# Altium PCB Toygether_PCB.PcbDoc (part 1 of 2)
Units mm, origin at the board's own origin, x right, y up, seen from the top; angles counter-clockwise.
Board outline 55 x 58.13 mm, 5 copper layers (Top Layer, Signal Layer 1, Signal Layer 2, Signal Layer 3, Bottom Layer), stack 0.941 mm thick; 93 components, 74 nets, 341 pads, 162 vias.
Unrouted connection lines stored in the file: 2.
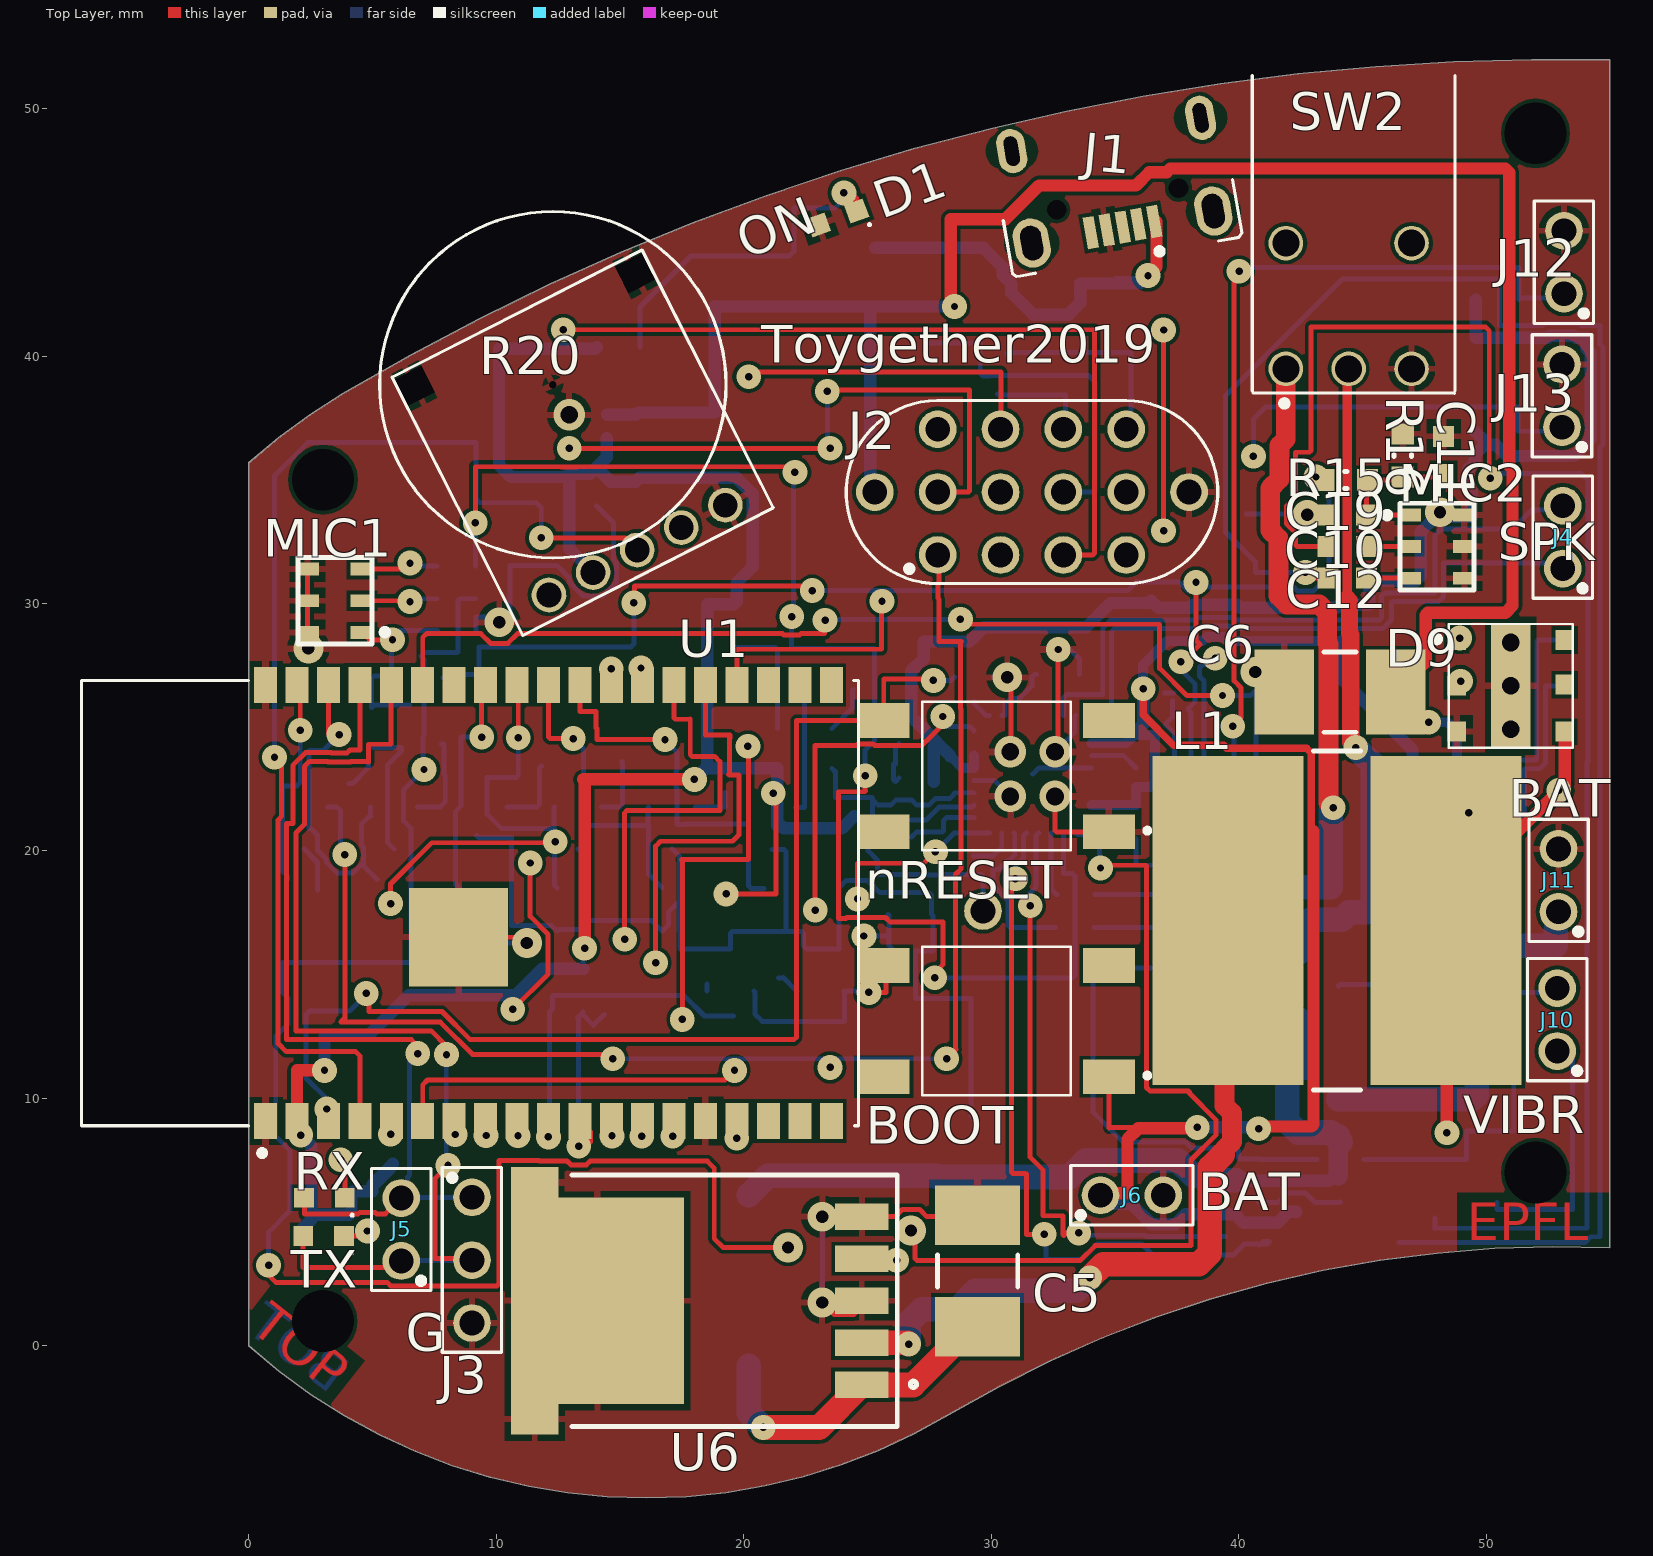
[diagram p0: Top Layer view]
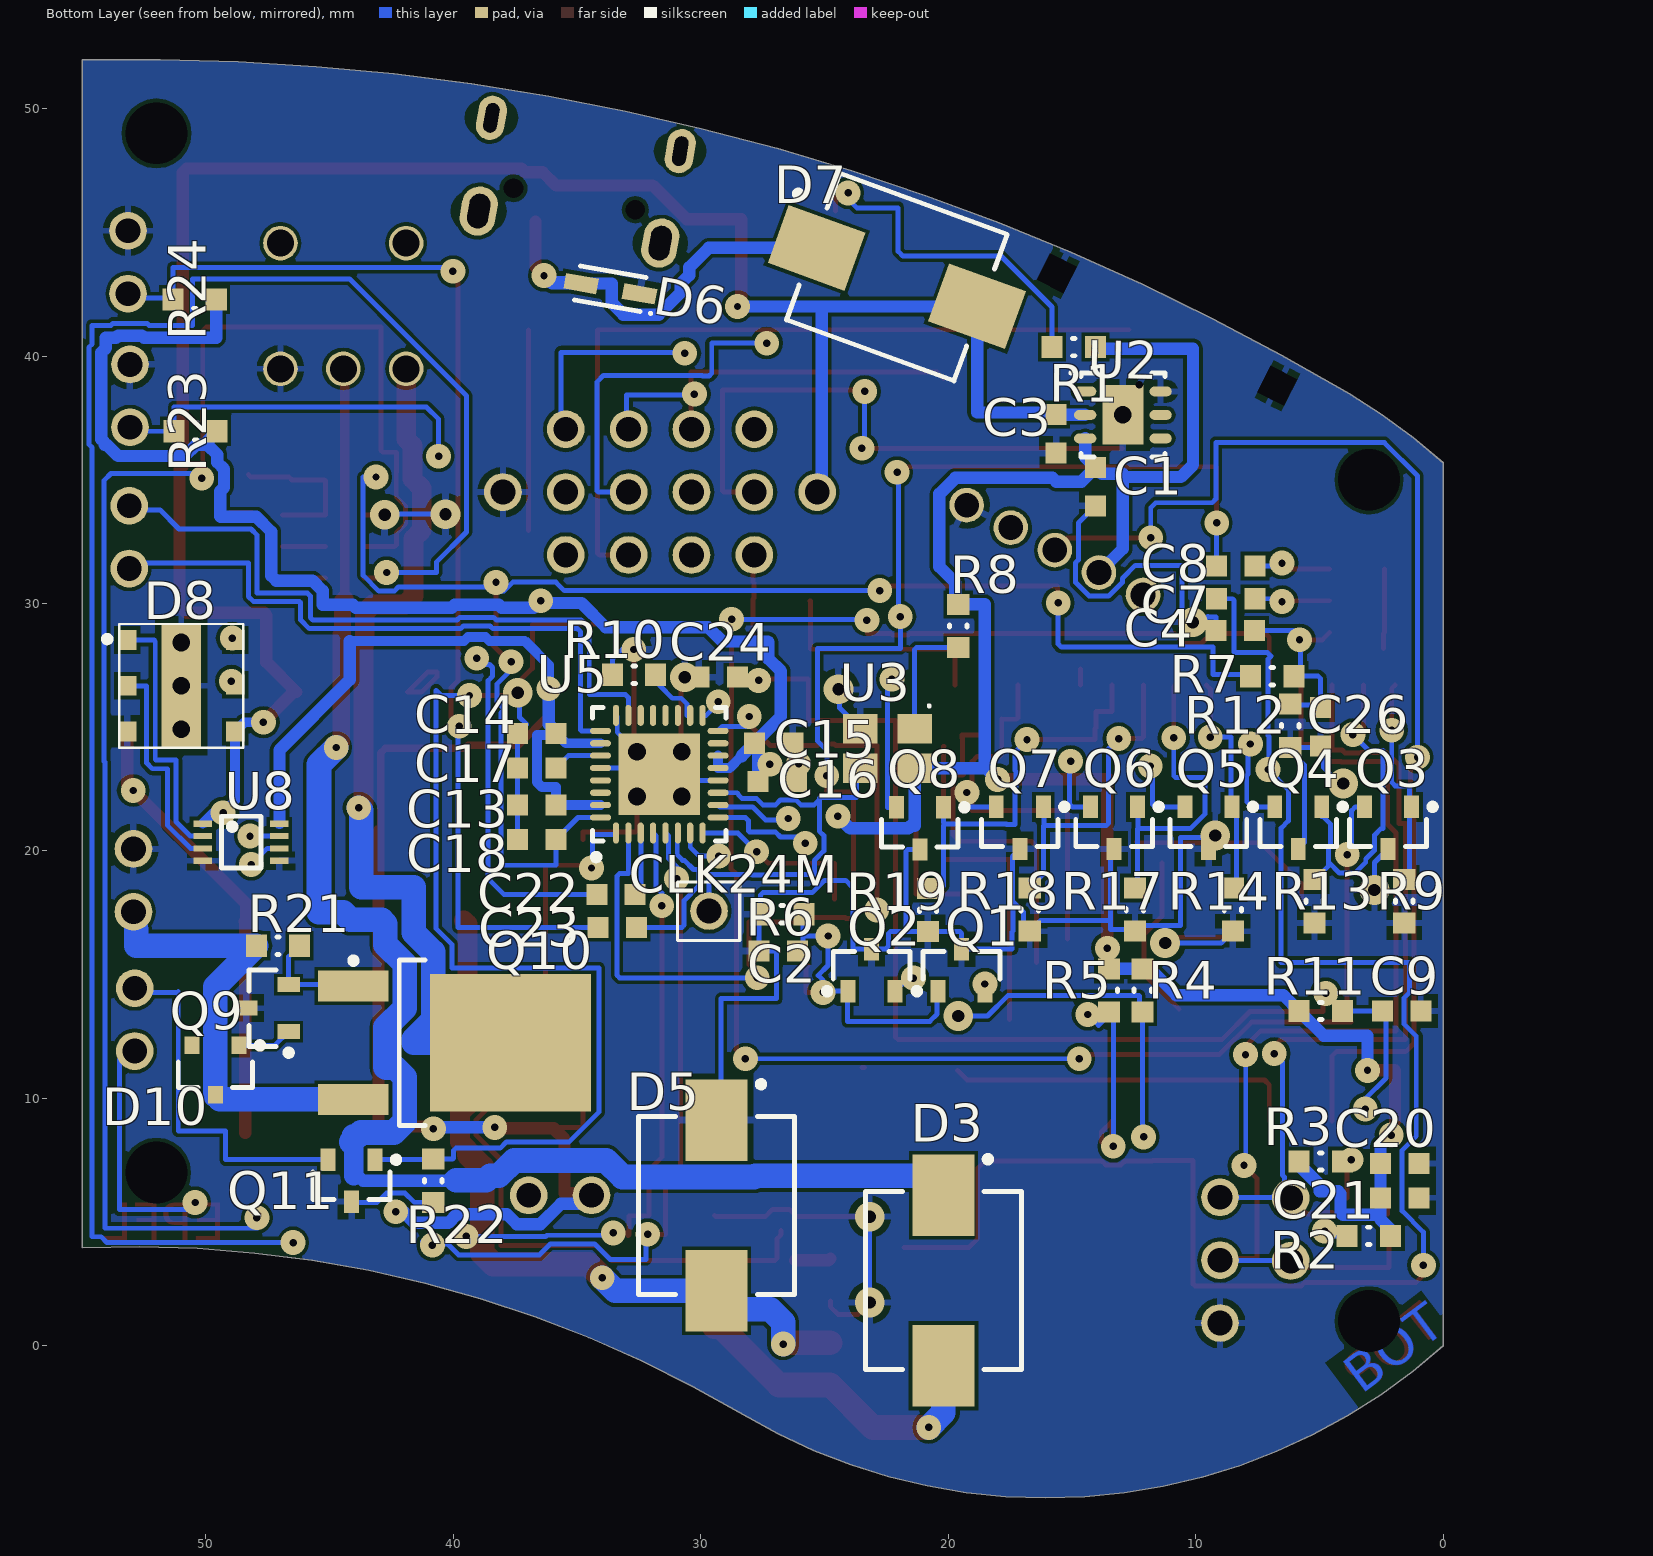
[diagram p1: Bottom Layer view, seen from below]
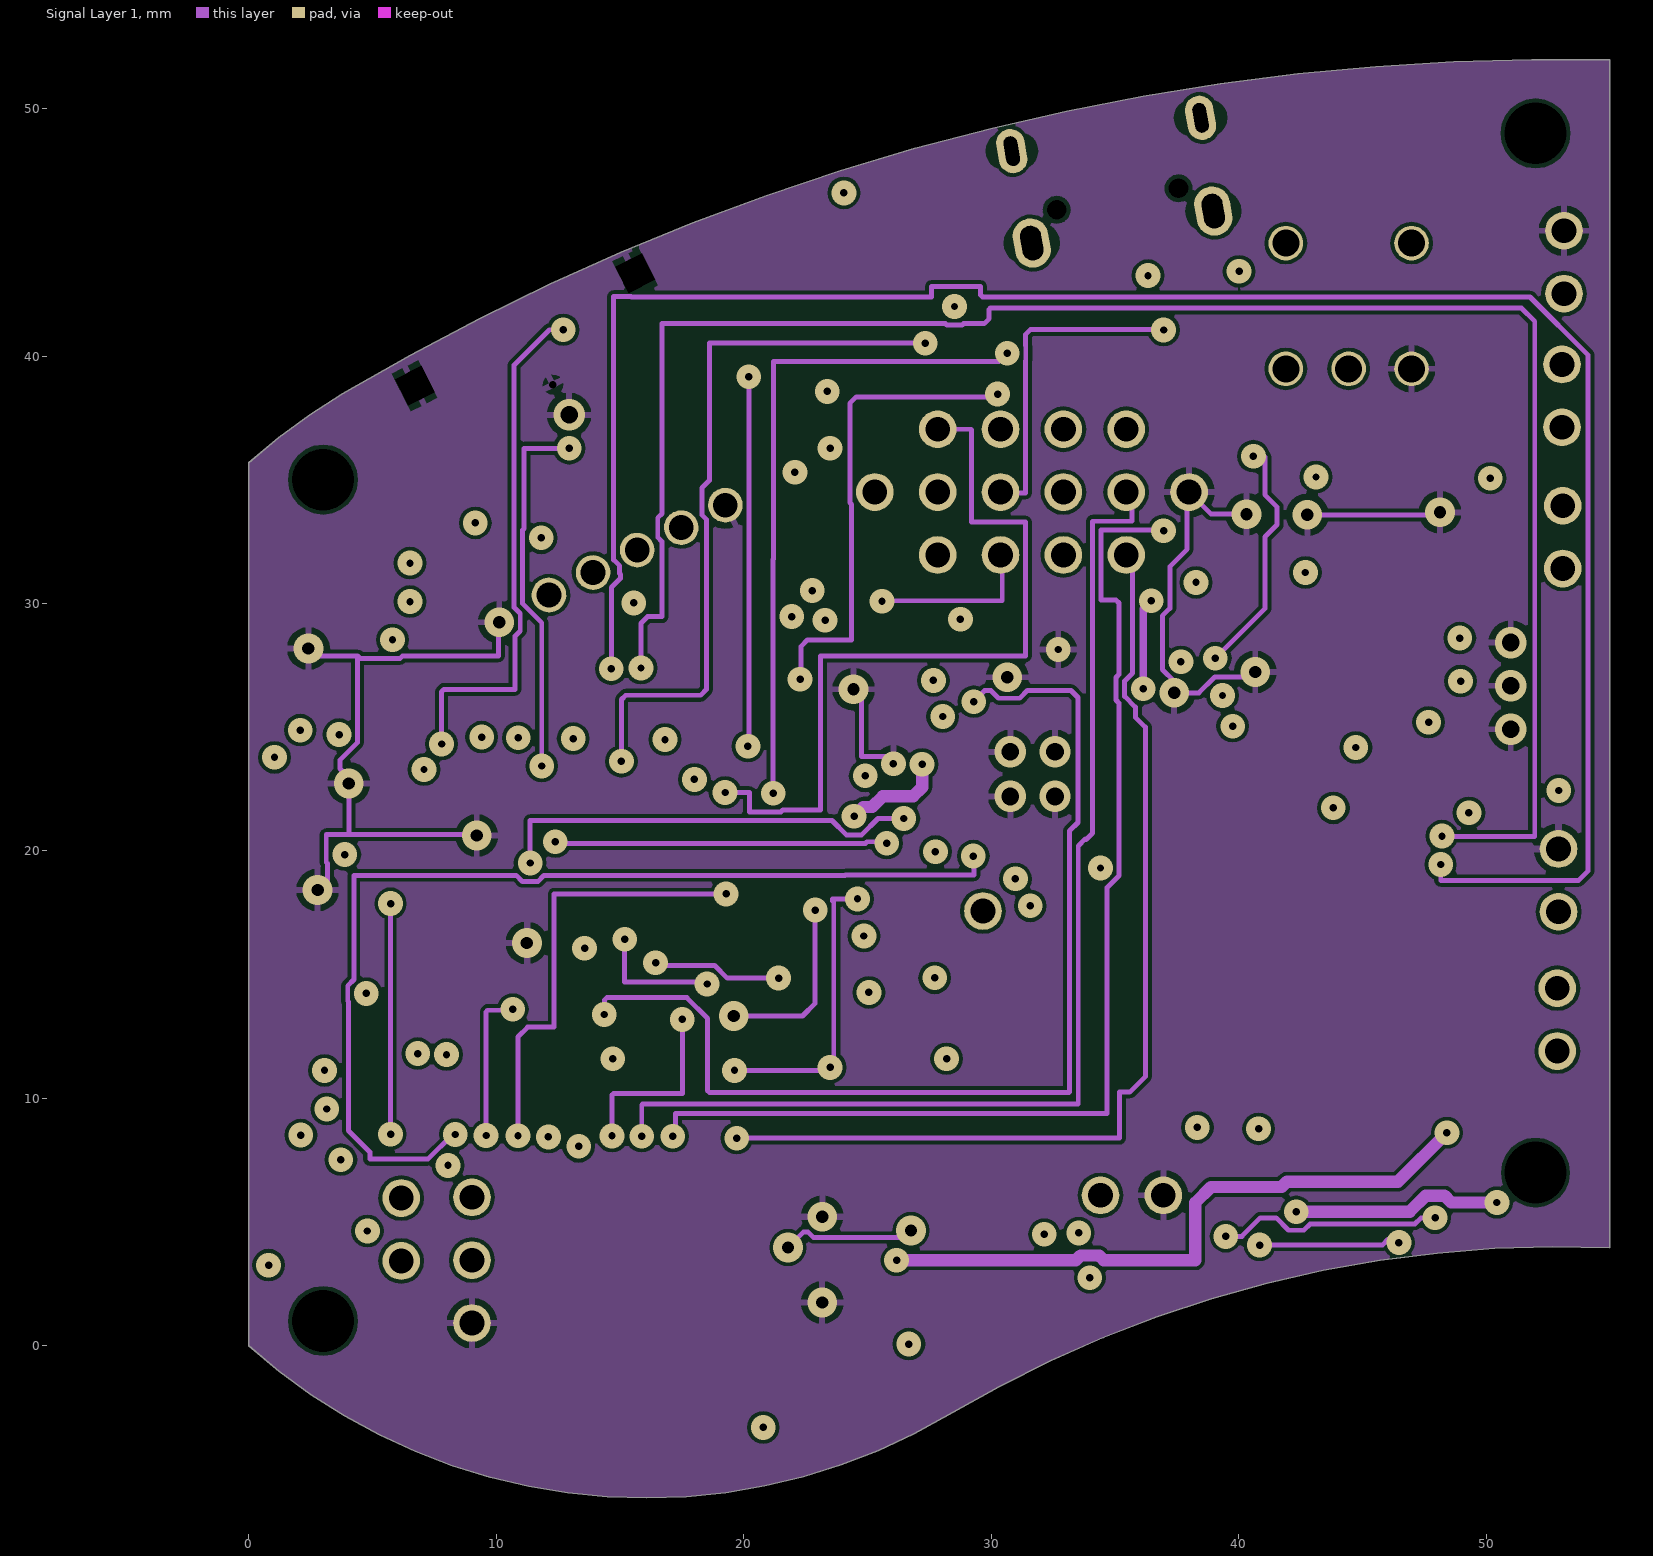
[diagram p2: Signal Layer 1]
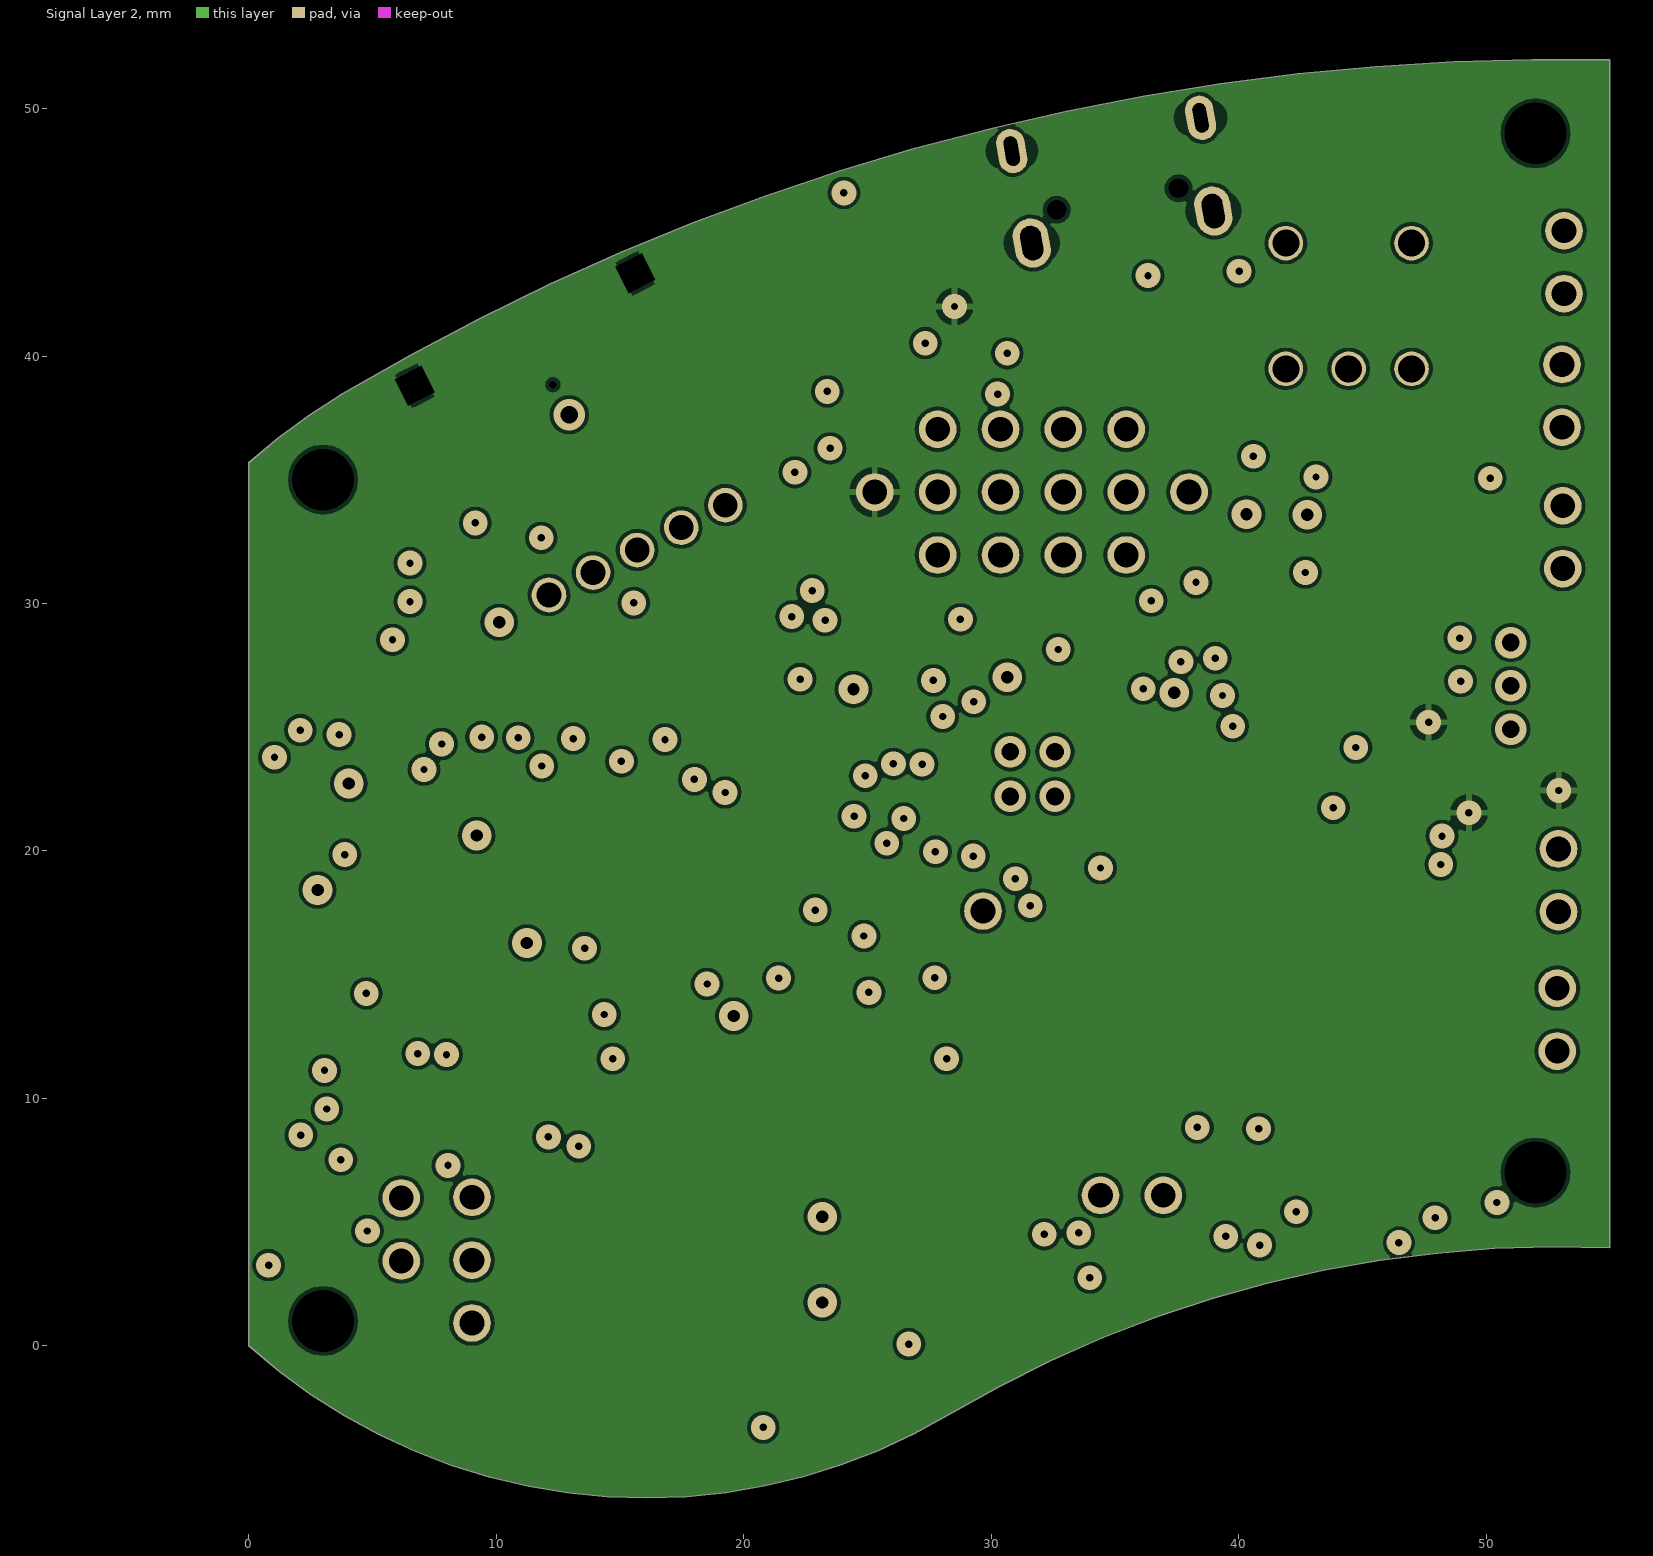
[diagram p3: Signal Layer 2]
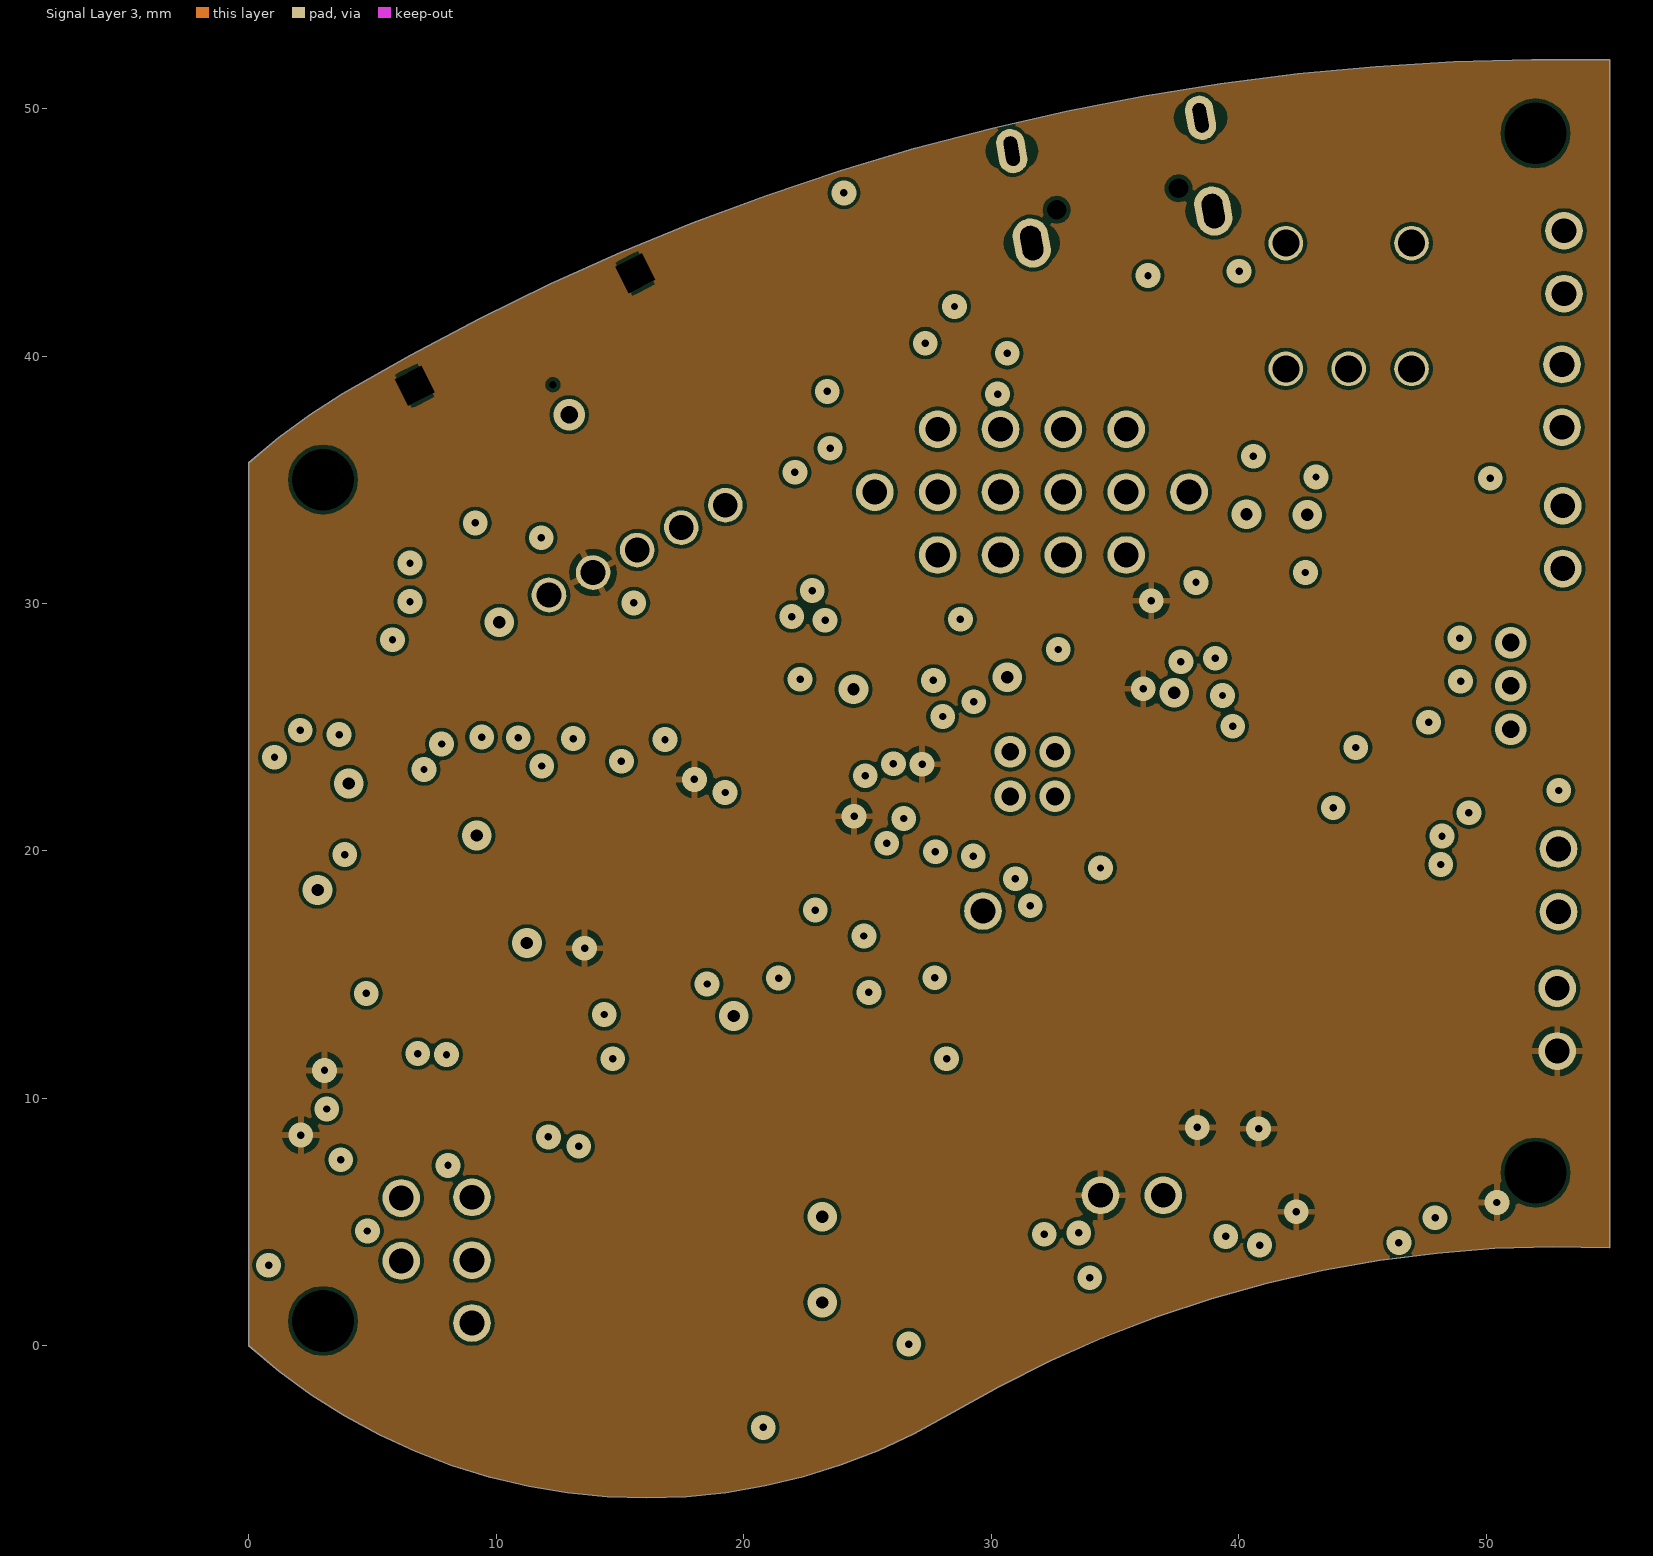
[diagram p4: Signal Layer 3]
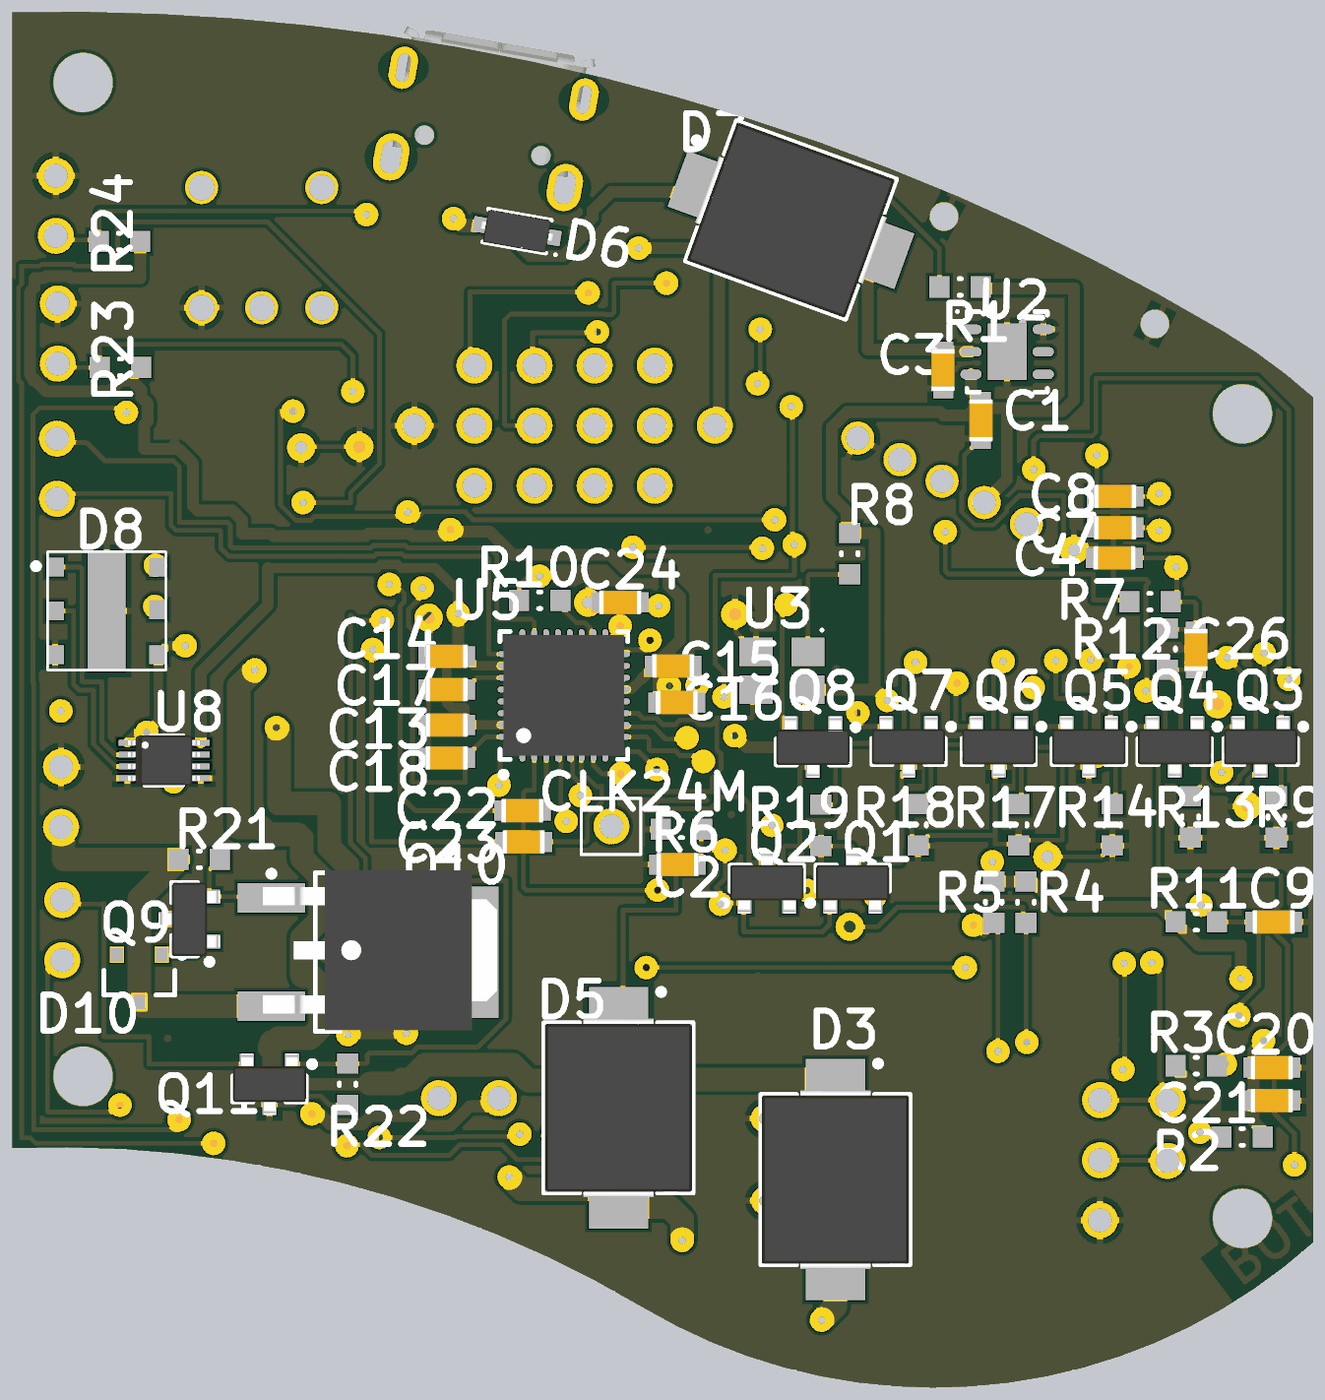
[diagram p6: 3D render of the assembled board from below, using the file's embedded part models]

## Layer stack, top to bottom
Top Solder: solder mask 0.0102, Solder Resist, Dk 3.5
Top Layer: signal copper 0.0356
Dielectric 1: core 0.254, FR-4, Dk 4.2
Signal Layer 1: signal copper 0.036
Dielectric 2: prepreg 0.127, Dk 4.2
Signal Layer 2: signal copper 0.036
Dielectric 4: core 0.254, Dk 4.2
Signal Layer 3: signal copper 0.036
Dielectric 3: prepreg 0.127, Dk 4.2
Bottom Layer: signal copper 0.0356
Bottom Solder: solder mask 0.0102, Solder Resist, Dk 3.5

## Board outline
55,51.97 51.844,51.982 48.69,51.891 45.541,51.697 42.399,51.4 39.269,51.001 36.154,50.499 33.056,49.896 29.98,49.192 26.929,48.387 23.906,47.484 20.914,46.482 17.956,45.382 15.036,44.187 12.156,42.896 9.32,41.512 6.531,40.037 3.791,38.47 2.468,37.625 1.202,36.694 0,35.683 0,0 1.225,-1.03 2.517,-1.976 3.868,-2.833 5.274,-3.599 6.728,-4.269 8.223,-4.84 9.753,-5.311 11.311,-5.679 12.89,-5.941 14.483,-6.098 16.083,-6.149 17.682,-6.092 19.275,-5.93 20.853,-5.661 22.409,-5.287 23.937,-4.811 25.43,-4.234 26.882,-3.558 28.285,-2.788 30.315,-1.647 32.397,-0.606 34.527,0.334 36.699,1.171 38.91,1.903 41.152,2.528 43.423,3.045 45.715,3.452 48.024,3.748 50.345,3.934 52.672,4.008 55,3.97

## Design rules (kind name [scope] priority, off if disabled: settings)
BoardOutlineClearance [All] p1: gap=0 ignorepadtopadclearanceinfootprint=FALSE
Clearance Clearance_1 [All] p1: gap=0.15 ignorepadtopadclearanceinfootprint=TRUE
HoleSize [All] p1: absolutevalues=TRUE maxlimit=2.54 minlimit=0.3 maxpercent=80.000 minpercent=20.000
HoleToHoleClearance [All] p1: gap=0.35 allowstackedmicrovias=TRUE
MinimumSolderMaskSliver [All] p1: minsoldermaskwidth=0.01
PlaneConnect [All] p1: planeconnectstyle=Relief reliefexpansion=0.3 reliefentries=4 reliefconductorwidth=0.2 reliefairgap=0.2
PolygonConnect [All] p1: connectstyle=Relief reliefconductorwidth=0.254 reliefentries=4 polygonreliefangle="90 Angle" airgapwidth=0.254
RoutingVias [All] p1: holewidth=0.5 width=1.2 viastyle="Through Hole" minholewidth=0.3 minwidth=1 maxholewidth=1.5 maxwidth=2.5
SilkToSilkClearance [All] p1 off: silktosilkclearance=0.15
SilkToSolderMaskClearance [IsPad] p1: minsilkscreentomaskgap=0 clearancetoexposedcopper=TRUE
SolderMaskExpansion [All] p1: expansion=0.05
UnRoutedNet [All] p1: checkbadconnections=TRUE
Width [All] p1: maxlimit=2 minlimit=0.15 preferedwidth=0.2
23 further rules are at their usual default settings.

## Components (designator, comment, footprint, x,y, rotation, side; value= is the part's Value field where it differs from the comment)
BOOT "LL3301NF065QG" PUSH_BUTTON-LL3301NF065QG 30.21,13.12 r180 top (schematic designator SW1)
C1 "4.7uF(20%)" CAPC0603 14.05,34.72 r90 bottom
C2 "0.1uF(20%)" CAPC0603 26.878,15.951 r180 bottom
C3 "4.7uF(20%)" CAPC0603 15.65,36.855 r90 bottom
C4 "0.1uF(20%)" CAPC0603 8.41,28.91 r180 bottom
C5 "100uF(20%)" CAPC2312 29.45,3.02 r270 top
C6 "100uF(20%)" CAPC2312 44.1,26.42 r0 top
C7 "4.7uF(20%)" CAPC0603 8.38,30.19 r180 bottom
C8 "4.7uF(20%)" CAPC0603 8.38,31.51 r180 bottom
C9 "0.1uF(20%)" CAPC0603 1.68,13.53 r0 bottom
C10 "4.7uF(20%)" CAPC0603 44.39,32.3 r0 top
C11 "220pF(20%)" CAPC0603 48.29,35.98 r270 top
C12 "4.7uF(20%)" CAPC0603 44.39,31.02 r0 top
C13 "4.7uF(20%)" CAPC0603 36.63,21.85 r180 bottom
C14 "4.7uF(20%)" CAPC0603 36.63,24.75 r180 bottom
C15 "4.7uF(20%)" CAPC0603 27.06,24.35 r0 bottom
C16 "4.7uF(20%)" CAPC0603 26.91,22.8 r0 bottom
C17 "4.7uF(20%)" CAPC0603 36.63,23.35 r0 bottom
C18 "4.7uF(20%)" CAPC0603 36.63,20.46 r0 bottom
C19 "0.1uF(20%)" CAPC0603 44.39,33.58 r0 top
C20 "22uF(20%)" CAPC0603 1.76,7.37 r0 bottom
C21 "0.1uF(20%)" CAPC0603 1.76,5.98 r0 bottom
C22 "4.7uF(20%)" CAPC0603 33.43,18.23 r180 bottom
C23 "4.7uF(20%)" CAPC0603 33.38,16.911 r180 bottom
C24 "0.1uF(20%)" CAPC0603 29.3,27.03 r180 bottom
C26 "220pF(20%)" CAPC0603 4.965,25.02 r90 bottom
CLK24M "PIN_TESTPOINT" PIN_TESTPOINT 29.67,17.57 r180 bottom (schematic designator J7)
D1 "SML-D12U1WT86" SML-D12U1WT86 23.79,45.58 r200 top
D3 "B340CE-13" SCH_DIODE-B3xxCE 20.2,2.64 r270 bottom
D5 "B340CE-13" SCH_DIODE-B3xxCE 29.37,5.67 r270 bottom
D6 "CDSOD323" SOD-323-SCHOTTKY_DIODE-30V/0.5A 33.66,42.72 r10 bottom
D7 "B340CE-13" SCH_DIODE-B3xxCE 22.08,43.19 r200 bottom
D8 "APA102C-5050" APA102C-5050 51,26.67 r180 bottom
D9 "APA102C-5050" APA102C-5050 51,26.67 r0 top
D10 "BZX84-A6V8,215" ZEN_DIODE-SOT23 49.62,11.14 r270 bottom
J1 "710-629105150521" USB-MICRO-TYPE-B-FEM 35.31,45.21 r190 top
J2 "EXT_CON" EXT_CON_14P 25.3,34.5 r0 top
J3 "CON_3P" CON_3P 9.02,5.99 r270 top
J4 "CON_2P" CON_2P 53.1,31.41 r90 top
J5 "CON_2P" CON_2P 6.16,3.43 r90 top
J6 "CON_2P" CON_2P 34.42,6.08 r0 top
J10 "CON_2P" CON_2P 52.88,11.91 r90 top
J11 "CON_2P" CON_2P 52.93,17.54 r90 top
J12 "CON_2P" CON_2P 53.15,42.52 r90 top
J13 "CON_2P" CON_2P 53.07,37.12 r90 top
L1 "100uH(10%)" IND1307-100uH 43.98,17.19 r0 top
MIC1 "ICS40619" MIC-ICS40619 3.48,30.11 r180 top
MIC2 "ICS40619" MIC-ICS40619 48.02,32.3 r0 top
nRESET "LL3301NF065QG" PUSH_BUTTON-LL3301NF065QG 30.21,23.02 r180 top (schematic designator SW3)
Q1 "RUC002N05HZGT116" MOS-N_RUC002N05 19.47,15.18 r90 bottom
Q2 "RUC002N05HZGT116" MOS-N_RUC002N05 23.1,15.18 r90 bottom
Q3 "RUC002N05HZGT116" MOS-N_RUC002N05 2.23,20.93 r270 bottom
Q4 "RUC002N05HZGT116" MOS-N_RUC002N05 5.86,20.93 r270 bottom
Q5 "RUC002N05HZGT116" MOS-N_RUC002N05 9.49,20.93 r270 bottom
Q6 "RUC002N05HZGT116" MOS-N_RUC002N05 13.3,20.93 r270 bottom
Q7 "RUC002N05HZGT116" MOS-N_RUC002N05 17.11,20.93 r270 bottom
Q8 "RUC002N05HZGT116" MOS-N_RUC002N05 21.15,20.91 r270 bottom
Q9 "RUC002N05HZGT116" MOS-N_RUC002N05 47.51,13.645 r0 bottom
Q10 "FDD4685-F085P" MOS-P_FDD4685 39.99,12.25 r180 bottom
Q11 "RUC002N05HZGT116" MOS-N_RUC002N05 44.12,6.67 r270 bottom
R1 "300R(5%)" RC0603 14.93,40.36 r180 bottom
R2 "300R(5%)" RC0603 3.01,4.44 r180 bottom
R3 "300R(5%)" RC0603 4.95,7.45 r0 bottom
R4 "10K(5%)" RC0603 12.15,14.36 r270 bottom
R5 "10K(5%)" RC0603 13.51,14.36 r270 bottom
R6 "10K(5%)" RC0603 26.709,17.44 r180 bottom
R7 "680R(5%)" RC0603 6.91,27.06 r0 bottom
R8 "10K(5%)" RC0603 19.6,29.09 r270 bottom
R9 "10K(5%)" RC0603 1.57,17.96 r90 bottom
R10 "10K(5%)" RC0603 32.7,27.12 r180 bottom
R11 "10K(5%)" RC0603 4.95,13.53 r0 bottom
R12 "47K(5%)" RC0603 6.18,25.06 r90 bottom
R13 "10K(5%)" RC0603 5.2,17.96 r90 bottom
R14 "10K(5%)" RC0603 8.5,17.63 r90 bottom
R15 "680R(5%)" RC0603 44.33,34.99 r180 top
R16 "47K(5%)" RC0603 46.64,35.98 r270 top
R17 "10K(5%)" RC0603 12.46,17.63 r90 bottom
R18 "10K(5%)" RC0603 16.71,17.63 r90 bottom
R19 "10K(5%)" RC0603 20.82,17.61 r90 bottom
R20 "10K" POT-RK10J12E0A0A 15.695,32.157 r27 top
R21 "10M(5%)" RC0603 47.09,16.17 r0 bottom
R22 "10K(5%)" RC0603 40.82,6.67 r90 bottom
R23 "10K(5%)" RC0603 50.42,36.96 r180 bottom
R24 "10K(5%)" RC0603 50.46,42.28 r180 bottom
RX "SML-D12Y1WT86" SML-D12U1WT86 3.055,5.98 r180 top (schematic designator D2)
SW2 "200MSP1T1B2M6QE" "SPDT- 200MSP1T1B2M6QE" 44.45,39.483 r0 top
TX "SML-D12D1W" SML-D12U1WT86 3.025,4.44 r180 top (schematic designator D4)
U1 "ESP-WROVER-IB" ESP32-WROVER-I 8.94,17.89 r90 top locked
U2 "ST1L05APU33R" LDO-ST1L05 12.945,37.62 r180 bottom
U3 "OSC_24MHz" OSC_24MHz 22.46,24.14 r0 bottom
U5 "WM8978_CODEC" WM8978_CODEC 31.68,23.1 r90 bottom
U6 "LM2576SX-5.0" LM2576SX-STEP_DOWN-5.0 12.307,1.82 r0 top
U8 "SN74LVC2T45DCTRE4" VOLTAGE_TRANSLATOR_3.3-5V 48.58,20.35 r180 bottom

## Footprints (in the part's own frame and the unit in brackets; to place one, negate y for a bottom-side part, rotate by r counter-clockwise, add the part's x,y. Pads: shape width x height; smd on the part's side, far side on the other; paste and mask are expansions set on the pad)
APA102C-5050 [mm]
  rect 0.75x0.8 smd: 1(-2.175,1.85) 2(-2.175,0) 3(-2.175,-1.85) 4(2.175,-1.85) 5(2.175,0.05) 6(2.175,1.85)
  rect 1.6x5.1 smd: 3(0,0)
  silkscreen extent -3.12,-2.5 2.5,2.5
CAPC0603 [mm] "Chip Capacitor, 2-Leads, Body 1,60x0,80mm, IPC Medium Density"
  rect 0.85x0.85 smd: 1(-0.775,0) 2(0.775,0)
  body extent -0.9,-0.5 0.9,0.5, height 1
CAPC2312 [mm] "Chip Capacitor, 2-Leads, Body 6.00x3.25mm, IPC Medium Density"
  rect 2.4x3.45 smd: 1(-2.25,0) 2(2.25,0)
  silkscreen extent -0.65,-1.63 0.65,1.63, body extent -3.1,-1.7 3.1,1.7, height 2
CON_2P [mil]
  round 60 hole 39.37: 1(0,0) 2(100,0)
  silkscreen extent -47,-47 147,47
CON_3P [mm]
  round 1.524 hole 1: 1(-0.01,0) 2(2.53,0) 3(5.07,0)
  silkscreen extent -1.21,-1.2 6.25,1.2
ESP32-WROVER-I [mm] "SMD, 38-Leads, Body 18x25.5mm, Pitch 1.27mm"
  rect 1.45x0.93 smd: 1(-8.81,8.26) 2(-8.81,6.99) 3(-8.81,5.72) 4(-8.81,4.45) 5(-8.81,3.18) 6(-8.81,1.91) 7(-8.81,0.64) 8(-8.81,-0.63) 9(-8.81,-1.9) 10(-8.81,-3.17) 11(-8.81,-4.44) 12(-8.81,-5.71) 13(-8.81,-6.98) 14(-8.81,-8.25) 15(-8.81,-9.52) 16(-8.81,-10.79) 17(-8.81,-12.06) 18(-8.81,-13.33) 19(-8.81,-14.6) 20(8.81,-14.6) 21(8.81,-13.33) 22(8.81,-12.06) 23(8.81,-10.79) 24(8.81,-9.52) 25(8.81,-8.25) 26(8.81,-6.98) 27(8.81,-5.71) 28(8.81,-4.44) 29(8.81,-3.17) 30(8.81,-1.9) 31(8.81,-0.63) 32(8.81,0.64) 33(8.81,1.91) 34(8.81,3.18) 35(8.81,4.45) 36(8.81,5.72) 37(8.81,6.99) 38(8.81,8.26)
  rect 4x4 smd: 39(-1.38,0.47)
  silkscreen extent -10.22,-15.7 9,15.7
EXT_CON_14P [mil]
  round 60 hole 39.37: 1(100,-100) 2(200,-100) 3(300,-100) 4(400,-100) 5(100,0) 6(200,0) 7(300,0) 8(400,0) 9(100,100) 10(200,100) 11(300,100) 12(400,100) 13(0,0) 14(500,0)
  silkscreen extent -46,-146 546,146
IND1307-100uH [mm] "Precision Wire Wound Inductor, 2-Leads, Body 13.00x13.00mm, IPC Medium Density"
  rect 6.1x13.3 smd: 1(-4.4,0) 2(4.4,0)
  silkscreen extent -0.95,-6.85 0.95,6.85, body extent -6.6,-6.5 6.6,6.5, height 7.4
LDO-ST1L05 [mm] "SON, 6-Leads, Body 3x3mm, Pitch 0.95mm, Thermal Pad 2.4x1.65mm, IPC Low Density"
  oval 0.9x0.4 smd: 1(-1.525,0.95) 2(-1.525,0) 3(-1.525,-0.95) 4(1.525,-0.95) 5(1.525,0) 6(1.525,0.95)
  rect 1.65x2.4 smd: 7(0,0)
  silkscreen extent -2.15,-1.7 1.7,1.75, body extent -1.55,-1.55 1.55,1.55, height 0.95
LM2576SX-STEP_DOWN-5.0 [mm]
  rect 2.16x1.07 smd: 1(12.461,-3.4) 2(12.461,-1.7) 3(12.461,0) 4(12.461,1.7) 5(12.461,3.4)
  rect 1.91x1.235 smd: 6(-0.754,-4.782) 6(-0.754,4.782)
  rect 6.99x8.33 smd: 6(1.786,0)
  silkscreen extent 0.76,-5.08 14.68,5.08
MIC-ICS40619 [mm] "SOTFL, 6-Leads, Body 3.50x3.14mm, Pitch 1.28mm, IPC Medium Density"
  rect 0.932x0.522 smd: 1(-1.105,1.28) 2(-1.105,0) 3(-1.105,-1.28) 4(1.105,-1.28) 5(1.105,0) 6(1.105,1.28)
  silkscreen extent -2.15,-1.75 1.5,1.75, body extent -1.32,-1.75 1.33,1.75, height 0.99
MOS-N_RUC002N05 [mm] "SOT23, 3-Leads, Body 2.90x2.40mm, Pitch 0.95mm, IPC Medium Density"
  rect 0.9x0.6 smd: 1(-0.85,0.95) 2(-0.85,-0.95) 3(0.85,0)
  silkscreen extent -0.97,-1.55 0.75,1.93, body extent -1.3,-1.55 1.3,1.55, height 1.2
MOS-P_FDD4685 [mm] "DPAK, 3-Leads, Body 6.75x6.22mm, Pitch 2.29mm, IPC High Density"
  rect 2.85x1.25 smd: 1(-4.05,2.29) 2(-4.05,-2.29)
  rect 6.5x5.55 smd: 3(2.3,0)
  silkscreen extent -4.18,-3.35 -1.15,3.44, body extent -4.41,-3.3 5.5,3.45, height 2.39
OSC_24MHz [mm] "ECS-3225MV SMD Multi Volt Crystal Oscillator"
  rect 1.4x1.2 smd: 1(-1.1,-0.8) 2(1.1,-0.8) 3(1.1,0.8) 4(-1.1,0.8)
  silkscreen extent -1.74,-1.77 -1.64,-1.67, body extent -1.65,-1.3 1.65,1.3, height 1.2
PIN_TESTPOINT [mil]
  round 60 hole 39.37: 1(0,0)
  silkscreen extent -50,-47 49,46
POT-RK10J12E0A0A [mm]
  rect 0x0 hole 1.2 square: 1(-5,10) 1(5,10)
  round 0 hole 0.3: 1(0,7.5)
  round 1.4 hole 1: 1(4,0) 2(0,0) 3(-2,0) 4(2,0) 5(-4,0)
  silkscreen extent -7,-0.97 7,14.5
PUSH_BUTTON-LL3301NF065QG [mm]
  rect 2.1x1.4 smd: 1(-4.55,2.25) 2(4.55,2.25) 3(-4.55,-2.25) 4(4.55,-2.25)
  silkscreen extent -6.2,-3 3,3, body extent -4.5,-3 4.5,3, height 4.3
RC0603 [mm] "Chip Resistor, 2-Leads, Body 1.60x0.80mm, IPC Medium Density"
  rect 0.85x0.9 smd: 1(-0.875,0) 2(0.875,0)
  silkscreen extent -0.05,-0.35 0.05,0.35, body extent -0.75,-0.45 0.75,0.45, height 0.55
SCH_DIODE-B3xxCE [mm] "Molded Diode, 2-Leads, Body 6.86x5.91mm, IPC Medium Density"
  rect 3.3x2.5 smd: 1(-3.45,0) 2(3.45,0)
  silkscreen extent -5.02,-3.15 3.6,3.15, body extent -3.77,-3.11 3.77,3.11, height 2.5
SML-D12U1WT86 [mm] "Molded Diode, 2-Leads, Body 1,60x0,80mm, IPC Medium Density"
  rect 0.8x0.8 smd: 1(-0.825,0) 2(0.825,0)
  silkscreen extent -1.17,0.65 -1.08,0.75, body extent -1.07,-0.45 1.07,0.45, height 0.65
SOD-323-SCHOTTKY_DIODE-30V/0.5A [mm] "Molded Diode, 2-Leads, Body 2,50x1,30mm, IPC Medium Density"
  rect 1.35x0.65 smd: 1(-1.2,0) 2(1.2,0)
  silkscreen extent -1.82,-0.7 1.35,0.75, body extent -1.57,-0.7 1.57,0.7, height 1.1
"SPDT- 200MSP1T1B2M6QE" [mm]
  round 1.4 hole 1.09: 1(-2.54,0) 2(0,0) 3(2.54,0) 4(-2.54,5.08) 5(2.54,5.08)
  silkscreen extent -3.9,-1.52 4.3,11.85
USB-MICRO-TYPE-B-FEM [mm]
  rect 0.45x1.3 smd: 1(-1.3,0) 2(-0.65,0) 3(0,0) 4(0.65,0) 5(1.3,0)
  oval 1.15x1.8 hole 1.2 slot 0.55 at 0 deg: ""(-3.875,-3.8) ""(3.875,-3.8)
  oval 1.45x2 hole 1.4 slot 0.85 at 0 deg: ""(-3.725,0) ""(3.725,0)
  round 0 hole 0.8: ""(-2.5,-1.15) ""(2.5,-1.15)
  silkscreen extent -4.71,-1.13 4.7,1.35, body extent -4.1,-5.55 4.1,-0.15, height 2.67
VOLTAGE_TRANSLATOR_3.3-5V [mm] "TSSOP, 8-Leads, Body 2,00x2,30mm, Pitch 0,50mm, IPC Medium Density"
  rect 0.75x0.25 smd mask+0.102: 1(-1.55,0.75) 2(-1.55,0.25) 3(-1.55,-0.25) 4(-1.55,-0.75) 5(1.55,-0.75) 6(1.55,-0.25) 7(1.55,0.25) 8(1.55,0.75)
  silkscreen extent -0.8,-1.05 0.8,1.05, body extent -1.55,-1.05 1.55,1.05, height 0.9
WM8978_CODEC [mm] "QFN, 32-Leads, Body 5.00x5.00mm, Pitch 0.50mm, Thermal Pad 3.30x3.30mm, IPC Medium Density"
  oval 0.85x0.25 smd: 1(-2.375,1.75) 2(-2.375,1.25) 3(-2.375,0.75) 4(-2.375,0.25) 5(-2.375,-0.25) 6(-2.375,-0.75) 7(-2.375,-1.25) 8(-2.375,-1.75) 17(2.375,-1.75) 18(2.375,-1.25) 19(2.375,-0.75) 20(2.375,-0.25) 21(2.375,0.25) 22(2.375,0.75) 23(2.375,1.25) 24(2.375,1.75)
  oval 0.25x0.85 smd: 9(-1.75,-2.375) 10(-1.25,-2.375) 11(-0.75,-2.375) 12(-0.25,-2.375) 13(0.25,-2.375) 14(0.75,-2.375) 15(1.25,-2.375) 16(1.75,-2.375) 25(1.75,2.375) 26(1.25,2.375) 27(0.75,2.375) 28(0.25,2.375) 29(-0.25,2.375) 30(-0.75,2.375) 31(-1.25,2.375) 32(-1.75,2.375)
  rect 3.3x3.3 smd: 33(0,0)
  silkscreen extent -3.47,-2.7 2.7,2.7, body extent -2.55,-2.55 2.55,2.55, height 1
ZEN_DIODE-SOT23 [mm] "SOT23, 3-Leads, Body 3x1.4mm, Pitch 0.95mm"
  rect 0.7x0.6 smd paste-0.05: 1(-1,0.95) 2(-1,-0.95) 3(1,0)
  silkscreen extent -1.12,-1.5 0.7,1.92, body extent -0.7,-1.5 0.7,1.5, height 1.1

## Part data
BOOT nRESET: library part SPST_SW, Supplier Part Number 1=612-LL3301NF065QG, Supplier 1=Mouser
C1 C3 C7 C8 C10 C12 C13 C14 C15 C16 C17 C18 C22 C23: library part CAP-4.7uF(20%), "C1608JB1V475M080AC", Supplier Part Number 1=810-C1608JB1V475M08C, Supplier 1=Mouser
C2 C4 C9 C19 C21 C24: library part CAP-0.1uF(20%), "C1608X8R1E104M080AA", Supplier Part Number 1=810-C1608X8R1E104M0A, Supplier 1=Mouser
C5 C6: library part CAP-100uF(20%), "GRM31CR61A107ME05L", Supplier Part Number 1=581-TPSF107M016R0200, Supplier 1=Mouser
C11 C26: library part CAP-220pF(20%), "C1608CH2A221J080AA", Supplier Part Number 1=810-C1608CH2A221J08A, Supplier 1=Mouser
C20: library part CAP-22uF(20%), "F380J226MMAAH1", Supplier Part Number 1=581-F380J226MMAAH1, Supplier 1=Mouser
CLK24M: "1 Position Header, Breakaway Connector 0.100\" (2.54mm) Through Hole Tin"
D1: library part RED_LED, "SML-D12U1WT86-2.2V-20mA", Supplier Part Number 1=755-SML-D12U1WT86, Supplier 1=Mouser
D3 D5 D7: library part SCH_DIODE, Supplier Part Number 1=621-B340CE-13, Supplier 1=Mouser
D6: library part BIDIRECTIONAL_DIODE, "CDSOD323-T05LC - ESD Suppressors / TVS Diodes Bidirectional Ultra Low Cap", Supplier Part Number 1=652-CDSOD323-T05LC, Supplier 1=Mouser
D8 D9: library part APA102C, Supplier Part Number 1=474-COM-14863, Supplier 1=Mouser
D10: library part ZEN_DIODE-6.15V, Supplier Part Number 1=771-BZX84-A6V8,215, Supplier 1=Mouser
J1: library part USB-MICRO-TYPE-B_CON_6P, "USB Micro SMT Type B Horizontal", Supplier 1=Mouser, Supplier Part Number 1=710-629105150521
J2: "External connector to the LEDs and capacitive touch sensors (on the plush toy)"
J3: "3 Positions Header, Breakaway Connector 0.100\" (2.54mm) Through Hole Tin"
J4 J5 J6 J10 J11 J12 J13: "2 Positions Header, Breakaway Connector 0.100\" (2.54mm) Through Hole Tin"
L1: library part IND-100uH(10%), "SDR1307A-101K", Supplier Part Number 1=652-SDR1307A-101K, Supplier 1=Mouser
MIC1 MIC2: library part MIC-ICS40619, "Differential analog top-port microphone", Supplier Part Number 1=410-ICS-40619, Supplier 1=Mouser
Q1 Q2 Q3 Q4 Q5 Q6 Q7 Q8 Q9 Q11: library part MOSFET_N-CH_RUC002N05HZGT116, "RUC002N05HZGT116 (N-CH/50V/2.2R/200mA)", Supplier Part Number 1=755-RUC002N05HZGT116, Supplier 1=Mouser
Q10: library part MOSFET_P-CH_FDD4685-F085P, "FDD4685-F085P(P-CH/40V/35mR/32A)", Supplier Part Number 1=512-FDD4685_F085P, Supplier 1=Mouser
R1 R2 R3: library part RES-300R(5%), "RC0603JR-07300RL", Supplier Part Number 1=603-RC0603JR-07300RL, Supplier 1=Mouser
R4 R5 R6 R8 R9 R10 R11 R13 R14 R17 R18 R19 R22 R23 R24: library part RES-10K(5%), "RC0603JR-0710KL", Supplier Part Number 1=603-RC0603JR-0710KL, Supplier 1=Mouser
R7 R15: library part RES-680R(5%), "RC0603JR-07680RL", Supplier Part Number 1=603-RC0603JR-07680RL, Supplier 1=Mouser
R12 R16: library part RES-47K(5%), "RC0603JR-0747KL", Supplier Part Number 1=603-RC0603JR-0747KL, Supplier 1=Mouser
R20: library part POT-10K, "RK10J12E0A0A", Supplier Part Number 1=688-RK10J12E0A0A, Supplier 1=Mouser
R21: library part RES-10M(5%), "CRCW060310M0DHEAP", Supplier Part Number 1=71-CRCW060310M0DHEAP, Supplier 1=Mouser
RX: library part YELLOW_LED, "SML-D12Y1WT86_YELLOW-LED", Supplier Part Number 1=755-SML-D12Y1WT86, Supplier 1=Mouser
SW2: library part SPDT_SW, Supplier Part Number 1=612-200MSP1T1B2M6QE, Supplier 1=Mouser
TX: library part ORANGE_LED, "SML-D12D1WT86_ORANGE-LED", Supplier Part Number 1=755-SML-D12D1WT86, Supplier 1=Mouser
U1: Supplier Part Number 1=356-ESP32WROIB(16MB), Supplier 1=Mouser
U2: library part LDO-3.3, "Low drop linear voltage regulator", Supplier Part Number 1=511-ST1L05APU33R, Supplier 1=Mouser
U3: "Crystal Oscillator for CODEC", Supplier Part Number 1=520-3225MV-240-BNT, Supplier 1=Mouser
U5: "Stereo CODEC WM8978 with Speaker Driver", Supplier Part Number 1=238-WM8978CGEFL/V, Supplier 1=Mouser
U6: library part STEP_DOWN_LM2576SX-5.0, "LM2576SX-5.0/NOPB step down voltage regulator", Supplier Part Number 1=926-LM2576SX-5.0NOPB, Supplier 1=Mouser
U8: library part VOLTAGE_TRANSLATOR_3.3-5V, "Translation - Voltage Levels DUAL-BIT DUAL SUPPLY TRANSCEIVER", Supplier Part Number 1=595-SN74LVC2T45DCTR, Supplier 1=Mouser

## Free pads (board coordinates)
  round 1.524 hole 2.5: ""(3,1) ""(3,35) ""(52,7) ""(52,49)

## Via types
v1: diameter 1, hole 0.3, Top Layer to Bottom Layer, 78 vias
v2: diameter 1, hole 0.3, Top Layer to Signal Layer 1, 31 vias
v3: diameter 1, hole 0.3, Signal Layer 1 to Bottom Layer, 27 vias
v4: diameter 1.27, hole 0.711, Top Layer to Bottom Layer, 8 vias
v5: diameter 1.2, hole 0.5, Signal Layer 1 to Bottom Layer, 7 vias
v6: diameter 1.2, hole 0.5, Top Layer to Bottom Layer, 6 vias
v7: diameter 1.2, hole 0.5, Top Layer to Signal Layer 1, 5 vias

## Nets (pads, with @x,y where several pads share a name; then routed paths per layer and width w, separated by ;. In a path a pad name is that pad's centre, name@x,y a point inside that pad or via, vN(x,y) a via of type N, cw(c..) or ccw(c..) an arc to the next point about the centre after c; other vN are vias at no path point)
3V3: BOOT.1 C1.2 C13.2 C14.2 C15.2 C16.2 C20.2 C21.2 J6.1 J10.1 R1.2 R2.2 R3.2 R4.1 R5.1 R8.1 R11.2 R20.3 R23.2 R24.2 U1.2 U2.3 U3.4 U5.13 U5.14 U5.26 U5.31 U8.8 | length 247
  Top Layer w0.2: BOOT.1@34.76,10.87 34.76,8.82 34.77,8.81 34.785,8.825 35.985,8.825 35.948,8.788
  Top Layer w0.3: v1(36.145,26.554) 36.145,25.495 37.37,24.27 39.399,24.27 39.529,24.14 42.754,24.14 42.93,23.964 42.93,20.89 43.03,20.79
  Top Layer w0.5: U1.2@1.95,9.08 1.95,11.13 v1(3.06,11.13) ; v1(13.57,16.07) 13.57,22.83 13.51,22.89 v1(18.01,22.89) ; J6.1@34.42,6.08 34.51,6.17 35.51,6.17 35.51,8.35 35.948,8.788 38.296,8.788 v1(38.333,8.825) ; v1(40.81,8.77) 40.9,8.86 42.94,8.86 43.03,8.95 43.03,20.79
  Signal Layer 1 w0.2: v3(24.46,21.4) 24.835,21.775
  Signal Layer 1 w0.3: v1(36.145,26.554) 36.145,29.785 v3(36.47,30.11)
  Signal Layer 1 w0.5: 24.835,21.775 25.189,21.775 25.624,22.21 26.85,22.21 27.21,22.57 v3(27.21,23.5) ; v3(42.33,5.42) 46.919,5.42 47.569,6.07 48.314,6.07 48.594,5.79 v3(50.44,5.79)
  Bottom Layer w0.2: C20.2@2.535,7.37 C20.2@2.535,7.605 ; 4.998,6.239 5.825,7.066 R3.2@5.825,7.354 ; 12.95,35.11 12.95,35.234 ; R5.1@13.51,15.235 13.51,16.01 v1(13.57,16.07) ; 18.535,29.01 18.59,28.955 18.59,23.34 ; U5.13@29.305,23.35 U5.14@29.305,23.85 ; C14.2@35.855,24.75 C14.2@35.855,24.825 ; U8.8@47.03,21.1 U8.8@47.03,21.125 ; v3(50.44,5.79) 50.44,5.53 50.47,5.5 53.5,5.5 53.5,11.56 J10.1@53.32,11.74
  Bottom Layer w0.4: 28.352,23.832 28.835,23.35 U5.13@29.305,23.35 U5.14@29.305,23.85 ; U5.31@34.055,21.85 C13.2@35.855,21.85 35.855,22.575 36.425,22.575 36.63,22.78 36.63,24.685 35.855,24.685 C14.2@35.855,24.75 35.455,24.35 U5.26@34.055,24.35 ; v1(36.145,26.554) 36.145,27.515 37.12,28.49 38.022,28.49 38.032,28.48 38.548,28.48 38.708,28.64 39.412,28.64 39.572,28.48 44.19,28.48
  Bottom Layer w0.5: v1(2.105,8.514) 2.535,8.084 C20.2@2.535,7.605 ; R2.2@2.135,4.44 2.135,4.7 2.535,5.1 2.535,5.29 ; C20.2@2.535,7.37 C21.2@2.535,5.98 2.535,5.29 ; v1(3.06,11.13) 3.06,12.53 4.825,12.53 R11.2@5.825,13.53 6.465,14.17 10.79,14.17 11.855,15.235 R4.1@12.15,15.235 R5.1@13.51,15.235 ; R3.2@5.825,7.354 4.998,6.527 4.998,6.239 4.247,6.239 4.149,6.141 4.149,5.39 4.049,5.29 2.535,5.29 ; 12.95,35.234 13.789,35.234 C1.2@14.05,35.495 ; R20.3@13.913,31.249 12.95,32.212 12.95,35.11 10.6,35.11 10.11,35.6 10.11,40.3 13.995,40.3 R1.2@14.055,40.36 ; U2.3@14.47,36.67 14.47,35.915 C1.2@14.05,35.495 ; v1(18.01,22.89) 18.535,23.415 18.535,29.01 18.535,29.965 19.6,29.965 19.72,30.085 19.72,30.845 20.359,31.484 20.359,34.429 19.715,35.073 15.788,35.073 15.64,34.925 14.62,34.925 C1.2@14.05,35.495 ; 18.59,23.34 U3.4@21.36,23.34 21.36,21.02 21.506,21.02 21.616,20.91 23.97,20.91 v3(24.46,21.4) ; C16.2@27.685,22.8 27.685,24.2 C15.2@27.835,24.35 ; 28.352,23.832 C15.2@27.835,24.35 ; J6.1@34.42,6.08 34.767,5.733 35.663,5.733 36.479,4.918 37.441,4.918 37.843,5.32 39.854,5.32 40.204,4.97 41.567,4.97 42.017,5.42 v3(42.33,5.42) ; C14.2@35.855,24.825 36.145,25.115 v1(36.145,26.554) ; v1(38.333,8.825) 40.755,8.825 v1(40.81,8.77) ; 44.19,28.48 44.19,26.92 47.03,24.08 U8.8@47.03,21.125 ; R23.2@49.545,36.96 49.94,36.565 49.94,36.41 ; R24.2@49.585,42.28 49.585,40.735 49.59,40.74 52.507,40.74 52.589,40.822 53.551,40.822 53.638,40.735 54.045,40.735 54.045,40.328 54.232,40.141 54.232,36.639 54.1,36.507 54.1,36.41 54.003,36.41 53.551,35.958 50.856,35.958 50.404,36.41 49.94,36.41 ; C15.2@27.835,24.35 27.835,24.362 26.768,25.429 26.768,27.263 27.27,27.765 27.27,28.44 27.29,28.46 29.133,28.46 29.713,29.04 33.843,29.04 34.823,30.02 36.38,30.02 v3(36.47,30.11) 36.75,29.83 38.059,29.83 38.169,29.94 39.95,29.94 40.06,29.83 43.947,29.83 44.057,29.94 45.28,29.94 45.28,30.507 45.693,30.92 47.16,30.92 47.36,31.12 47.36,32.897 47.973,33.51 49.41,33.51 49.42,33.52 49.42,34.537 49.27,34.687 49.27,35.433 49.545,35.708 49.545,36.015 49.94,36.41
5V: C3.2 C6.2 D7.2 D8.4 D9.4 J2.13 L1.2 U2.2 U6.4 U8.1 | length 132.1
  Top Layer w0.2: L1.2@48.38,17.19 L1.2@48.43,17.14
  Top Layer w0.5: U6.4@24.768,3.52 24.828,3.46 v2(26.18,3.46) ; v1(28.52,42) 28.37,42.15 28.37,45.53 30.58,45.53 31.94,46.89 35.853,46.89 36.39,47.427 37.091,47.427 37.241,47.577 50.777,47.577 50.94,47.413 50.94,35.563 51.07,35.433 51.07,29.91 50.78,29.62 47.65,29.62 47.56,29.53 47.56,27.63 C6.2@46.35,26.42 ; C6.2@46.46,26.42 v1(47.68,25.2) ; L1.2@48.38,17.19 48.38,17.88 v1(52.94,22.44) 53.175,22.675 D9.4@53.175,24.82 ; v2(48.42,8.61) 48.42,17.13 L1.2@48.43,17.14
  Signal Layer 1 w0.5: v2(26.18,3.46) 33.427,3.46 33.617,3.65 34.363,3.65 34.553,3.46 38.25,3.46 38.25,5.78 38.885,6.415 41.739,6.415 41.957,6.633 46.443,6.633 v2(48.42,8.61)
  Bottom Layer w0.2: U2.2@14.47,37.62 14.48,37.63 C3.2@15.65,37.63 C3.2@15.738,37.718
  Bottom Layer w0.4: v1(47.68,25.2) 48.445,25.2 D8.4@48.825,24.82 48.825,22.025 v1(49.31,21.54) 49.69,21.54 U8.1@50.13,21.1
  Bottom Layer w0.5: U2.2@14.48,37.63 C3.2@15.65,37.63 ; C3.2@15.738,37.718 18.838,37.718 D7.2@18.838,42.01 18.848,42 25.12,42 ; J2.13@25.3,34.5 25.12,34.68 25.12,42 ; v1(28.52,42) 25.12,42
BOOT1: Q1.2 U1.25 | length 21.1
  Top Layer w0.2: v2(15.19,16.43) 15.19,21.54 15.28,21.63 19.04,21.63 19.04,23.605 18.825,23.82 17.91,23.82 17.84,23.89 17.84,25.34 17.82,25.32 17.24,25.32 17.19,25.37 U1.25@17.19,26.7
  Signal Layer 1 w0.2: v2(15.19,16.43) 15.19,14.7 18.44,14.7 v3(18.52,14.62)
  Bottom Layer w0.2: Q1.2@18.52,14.33 v3(18.52,14.62)
BOOT2: Q2.2 U1.24 | length 22
  Top Layer w0.2: v2(16.44,15.48) 16.44,20.19 16.64,20.39 19.55,20.39 19.81,20.65 19.81,23.06 19.42,23.06 19.39,23.09 19.42,23.12 19.42,24.541 19.45,24.571 19.45,24.68 18.46,24.68 U1.24@18.46,26.7
  Signal Layer 1 w0.2: v2(16.44,15.48) 16.55,15.37 18.831,15.37 19.341,14.86 v3(21.41,14.86)
  Bottom Layer w0.2: v3(21.41,14.86) 21.553,14.86 21.586,14.894 Q2.2@22.15,14.33
CLK_24M: CLK24M.1 U3.3 U5.11 | length 16.3
  Bottom Layer w0.2: U3.3@23.56,23.34 23.71,23.19 23.71,22.15 25.19,22.15 ; 25.21,22.13 25.21,22.073 ; U5.11@29.305,22.35 28.539,22.35 28.49,22.301 28.49,22.271 28.344,22.125 27.76,22.125 27.495,21.86 26.981,21.86 26.781,22.06 26.159,22.06 25.959,21.86 25.423,21.86 25.21,22.073 ; CLK24M.1@29.67,17.57 29.67,18.99 29.62,19.04 27.931,19.04 27.911,19.02 27.289,19.02 27.269,19.04 25.41,19.04 25.41,19.619 25.03,19.999 25.03,20.621 25.21,20.801 25.21,22.073
EXT_L2_P: C22.1 J13.1 R23.1 | length 39.8
  Top Layer w0.2: v1(39.06,27.79) 39.06,27.61 v1@39.07,27.6
  Signal Layer 1 w0.2: v1(39.06,27.79) 41.06,29.79 41.06,32.688 41.56,33.188 41.56,33.892 41.06,34.392 41.06,35.92 41.03,35.95 v1(40.6,35.95)
  Bottom Layer w0.2: C22.1@34.205,18.23 37.95,18.23 38.595,18.875 38.595,26.882 38.42,27.057 38.42,27.41 38.54,27.53 39.06,27.53 v1(39.06,27.79) ; v1(40.6,35.95) 40.6,37.45 41.085,37.935 51.295,37.935 R23.1@51.295,36.96 53.5,36.96 J13.1@53.51,36.95
EXT_R2_P: C23.1 J12.1 R24.1 | length 47.7
  Top Layer w0.2: v1(39.76,25.04) 40.1,25.38 40.1,26.591 39.82,26.871 39.82,43.22 v1(40.02,43.42)
  Bottom Layer w0.2: C23.1@34.155,16.911 39.811,16.911 39.811,24.989 v1(39.76,25.04) ; v1(40.02,43.42) 40.02,43.425 39.89,43.555 39.91,43.575 51.335,43.575 R24.1@51.335,42.28 51.405,42.35 J12.1@53.59,42.35
GND: C1.1 C2.1 C3.1 C4.1 C5.1 C6.1 C9.1 C11.1 C13.1 C14.1 C15.1 C16.1 C17.2 C18.2 C19.1 C20.1 C21.1 C24.1 C26.1 D1.2 D5.1 D6.1 D8.3 D9.3 J1.4 J2.14 J3.3 J6.2 J11.2 J12.2 J13.2 MIC1.4 MIC1.5 MIC1.6 MIC2.4 MIC2.5 MIC2.6 nRESET.1 Q1.3 Q2.3 Q3.3 Q4.3 Q5.3 Q6.3 Q7.3 Q8.3 Q9.3 Q11.3 R6.1 R9.1 R10.1 R12.1 R13.1 R14.1 R16.1 R17.1 R18.1 R19.1 R20.1 R22.1 SW2.3 U1.1 U1.15 U1.38 U1.39 U2.6 U2.7 U3.2 U5.12 U5.24 U5.28 U5.33 U6.3 U6.5 U6.6 U8.4 U8.5 | length 185.8
  Top Layer w0.2: MIC1.4@2.375,31.39 MIC1.5@2.375,30.11 MIC1.6@2.375,28.83 2.41,28.795 v7(2.41,28.18) ; U1.39@8.47,16.65 U1.39@8.47,16.51 11.01,16.51 v6(11.24,16.28) ; v6(23.17,1.75) 23.65,1.27 24.46,1.27 24.768,1.578 U6.3@24.768,1.82 ; v6(23.18,5.22) U6.5@24.768,5.22 26.118,5.22 26.408,5.51 27.112,5.51 27.402,5.22 29.4,5.22 C5.1@29.45,5.27 ; v6(30.65,27.02) 30.8,27.02 30.8,24.02 v4(30.78,24) ; v4(32.58,22.2) 32.58,20.83 32.64,20.77 nRESET.1@34.76,20.77 nRESET.1@34.76,20.46 ; v4(32.58,24) 32.71,24.13 v1(32.71,28.14) ; v1@32.68,28.19 v1@32.7,28.19 ; v6(42.78,33.58) C19.1@43.615,33.58 ; v7(48.14,33.68) 49.025,33.68 MIC2.6@49.125,33.58 ; C6.1@40.67,27.03 41.28,26.42 C6.1@41.85,26.42 41.04,27.23 v7(40.67,27.23) C6.1@40.67,27.03
  Signal Layer 1 w0.2: v7@2.7,27.88 4.4,27.88 ; v5@3.18,18.41 3.18,19.489 3.13,19.539 3.13,20.65 3.14,20.66 4.03,20.66 ; 5.58,20.66 4.03,20.66 ; 5.61,20.66 8.75,20.66 8.81,20.6 8.91,20.7 9.08,20.53 9.19,20.64 v5(9.21,20.62) ; v6(10.12,29.24) 10.09,29.21 10.09,27.88 6.217,27.88 6.119,27.782 4.498,27.782 4.4,27.88 ; v5(24.44,26.53) 24.48,26.49 24.68,26.49 24.77,26.4 24.77,23.82 25.75,23.82 v3(26.05,23.52) ; v5(40.32,33.61) 38.89,33.61 J2.14@38,34.5 37.92,34.42 37.92,32.19 37.22,31.49 37.22,29.799 36.92,29.499 36.92,27.329 37.395,26.854 v5(37.395,26.385) 38.394,26.385 39.039,27.03 40.44,27.03 40.64,27.23 v7(40.67,27.23) ; v6(42.78,33.58) 48.04,33.58 v7(48.14,33.68) ; 4.03,20.66 4.045,20.675 v5(4.045,22.726) 4.096,22.726 4.19,22.82 3.68,23.33 3.68,23.669 4.4,24.389 4.4,27.88
  Bottom Layer w0.2: Q3.3@2.23,20.08 2.78,19.53 v5(2.78,18.42) ; v5(4.045,22.726) 4.184,22.726 4.19,22.72 4.83,23.36 4.83,24.11 C26.1@4.965,24.245 5.025,24.185 R12.1@6.18,24.185 6.18,24.045 5.61,23.475 5.61,20.33 Q4.3@5.86,20.08 ; R14.1@8.5,16.755 8.975,16.28 v6(11.24,16.28) 11.24,16.98 11.23,16.99 ; C4.1@9.185,28.91 9.18,28.915 9.18,29.46 9.485,29.46 9.505,29.48 9.745,29.24 v6(10.12,29.24) ; v5(9.21,20.62) 9.29,20.54 10.61,20.54 10.61,16.99 11.23,16.99 ; v6@10.56,29.24 10.56,31.54 12.44,31.54 12.963,31.017 12.963,30.856 13.519,30.299 14.306,30.299 14.863,30.856 14.863,31.646 14.745,31.763 14.745,33.25 C1.1@14.05,33.945 ; Q6.3@13.3,20.08 13.45,19.93 13.45,17.18 ; Q7.3@17.11,20.08 17.41,19.78 17.41,17.976 17.395,17.961 ; Q8.3@21.15,20.06 21.63,20.06 21.705,19.985 21.705,16.735 ; v6(23.17,1.75) 23.18,1.76 v6(23.18,5.22) ; U3.2@23.56,24.94 24.4,25.78 24.4,26.49 v5(24.44,26.53) ; v3(26.05,23.52) 26.05,22.885 C16.1@26.135,22.8 C16.1@26.285,22.95 ; v3@26.135,23.52 26.135,24.2 C15.1@26.285,24.35 ; U5.12@29.305,22.85 30.13,22.85 v4(30.78,22.2) ; D5.1@29.37,9.12 29.181,9.309 29.181,14.029 26.941,14.029 26.941,15.951 C2.1@27.653,15.951 27.653,17.371 R6.1@27.584,17.44 27.584,18.226 27.5,18.31 25.505,18.31 25.005,18.81 24.15,18.81 23.85,18.51 23.85,16.03 Q2.3@23.1,16.03 22.549,16.03 22.409,16.169 22.409,16.671 22.345,16.735 21.705,16.735 ; C24.1@30.075,27.03 30.7,27.03 30.71,27.02 v6(30.65,27.02) ; U5.33@31.68,23.1 31.93,23.35 U5.28@34.055,23.35 ; v4(32.58,24) 33.38,24.8 33.38,25.425 U5.24@33.43,25.475 ; v1@32.7,28.19 33.14,28.19 33.575,27.755 R10.1@33.575,27.12 ; v5@37.015,26.385 v5(37.395,26.385) ; v5@37.33,26.07 37.33,25.399 37.043,25.112 C14.1@37.405,24.75 C17.2@37.405,23.35 C13.1@37.405,21.85 C18.2@37.405,20.46 ; v5(40.32,33.61) 42.67,33.61 42.74,33.54 v6(42.78,33.58) ; R22.1@40.82,5.795 41.58,5.795 41.955,6.17 42.705,6.17 43.08,5.795 44.095,5.795 Q11.3@44.12,5.82 ; U8.5@46.9,19.6 U8.5@47.03,19.6 ; 11.23,16.99 12.225,16.99 R17.1@12.46,16.755 12.525,16.82 13.45,16.82 13.45,17.18 ; 13.45,17.18 16.285,17.18 R18.1@16.71,16.755 16.97,17.015 16.97,17.536 17.395,17.961 ; 17.395,17.961 17.395,16.755 17.435,16.715 17.435,16.03 Q1.3@19.47,16.03 19.47,16.67 19.535,16.735 R19.1@20.82,16.735 21.705,16.735
  other v4: 51,24.92 51,26.67 51,28.42 12.945,37.62
I2C_SCL: R4.2 U1.10 U5.16 | length 36
  Top Layer w0.2: v1(22.89,17.61) 22.89,24.26 24.549,24.26 24.609,24.32 25.231,24.32 25.291,24.26 27.19,24.26 28.1,25.17 28.04,25.23 v1(28.04,25.43)
  Signal Layer 1 w0.2: v5(19.599,13.33) 22.38,13.33 22.89,13.84 v1(22.89,17.61)
  Bottom Layer w0.2: v1(12.11,8.44) 12.11,8.26 12.15,8.22 R4.2@12.15,13.485 12.27,13.605 12.27,14.13 12.3,14.16 14.064,14.16 14.074,14.15 17.596,14.15 18.416,13.33 v5(19.599,13.33) ; v1(22.89,17.61) v1@23.05,17.45 ; v1(28.04,25.43) 27.78,25.43 28.185,25.025 29.13,25.025 U5.16@29.305,24.85